# Altium PCB Sensor_Box_PoE.PCBDOC
Units mm, origin at the board's own origin, x right, y up, seen from the top; angles counter-clockwise.
Board outline 21.4 x 72.8 mm, 2 copper layers (Top, Bot), stack 1.571 mm thick; 39 components, 27 nets, 112 pads, 32 vias.
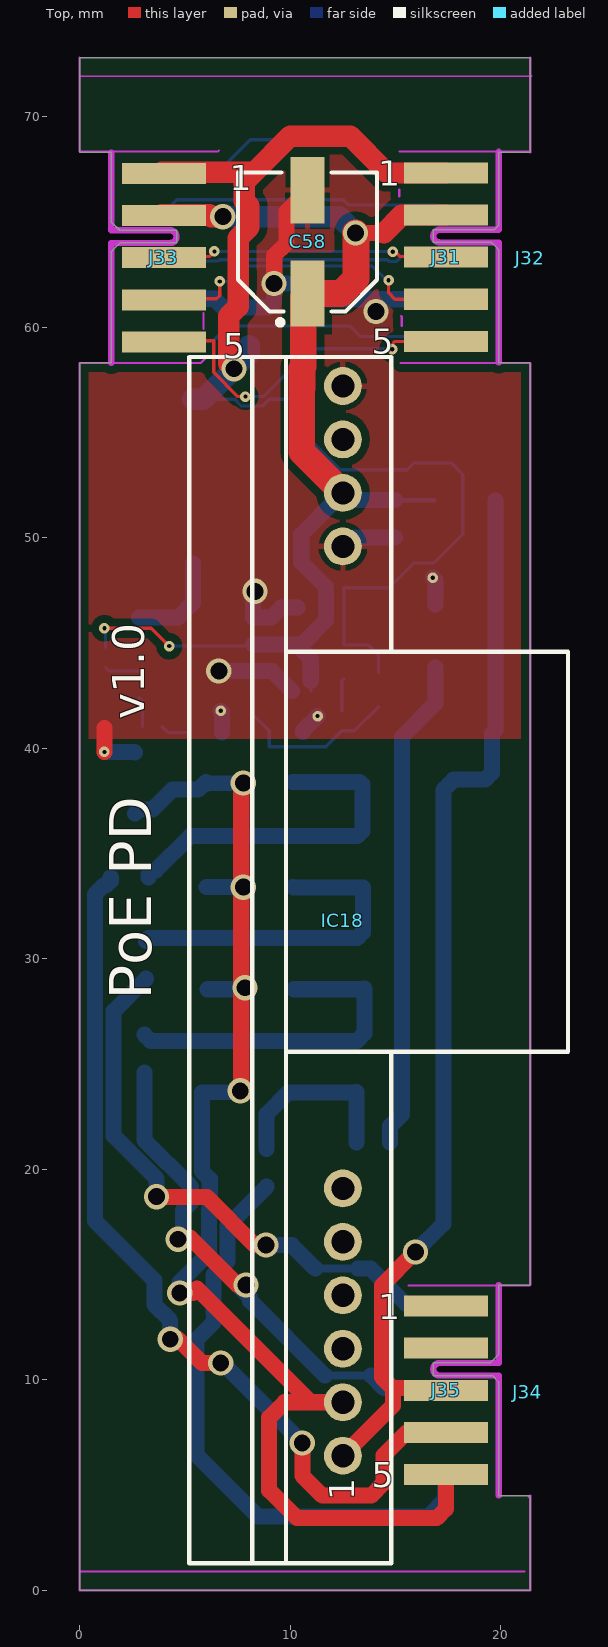
[diagram p0: Top view]
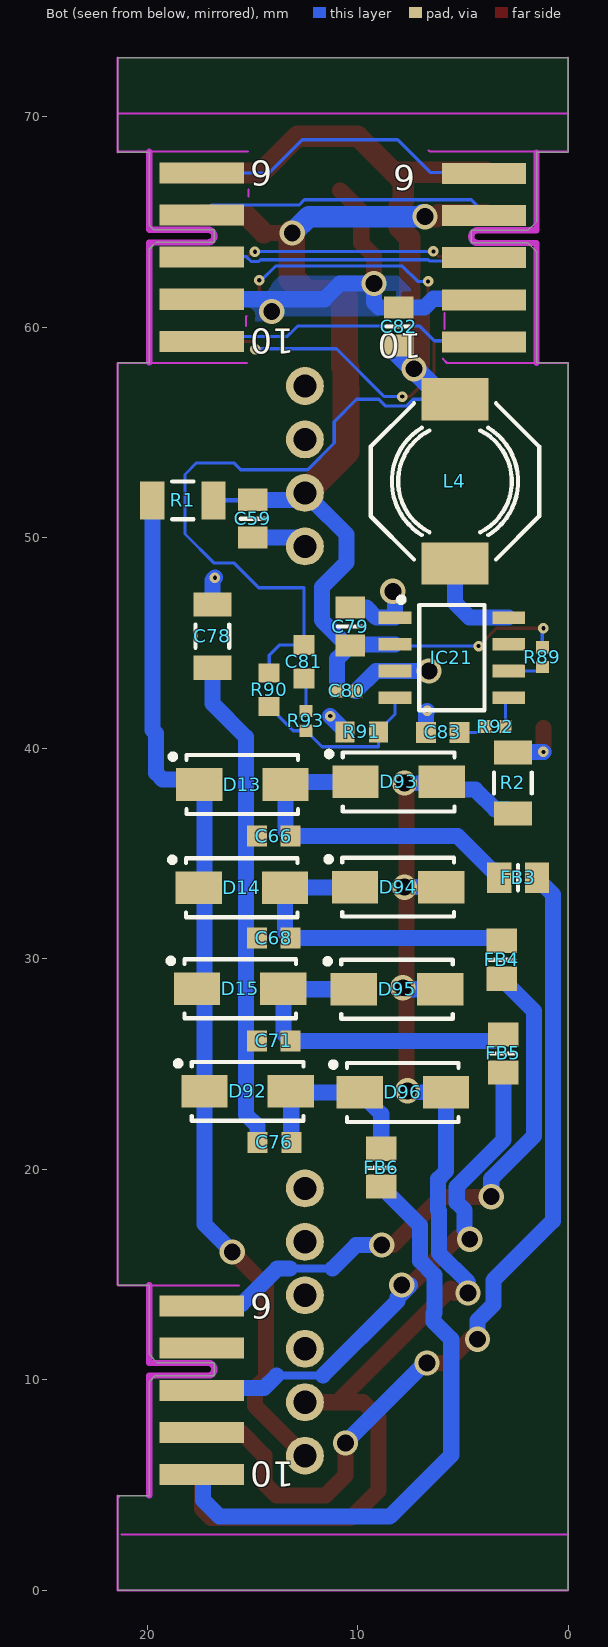
[diagram p1: Bot view, seen from below]
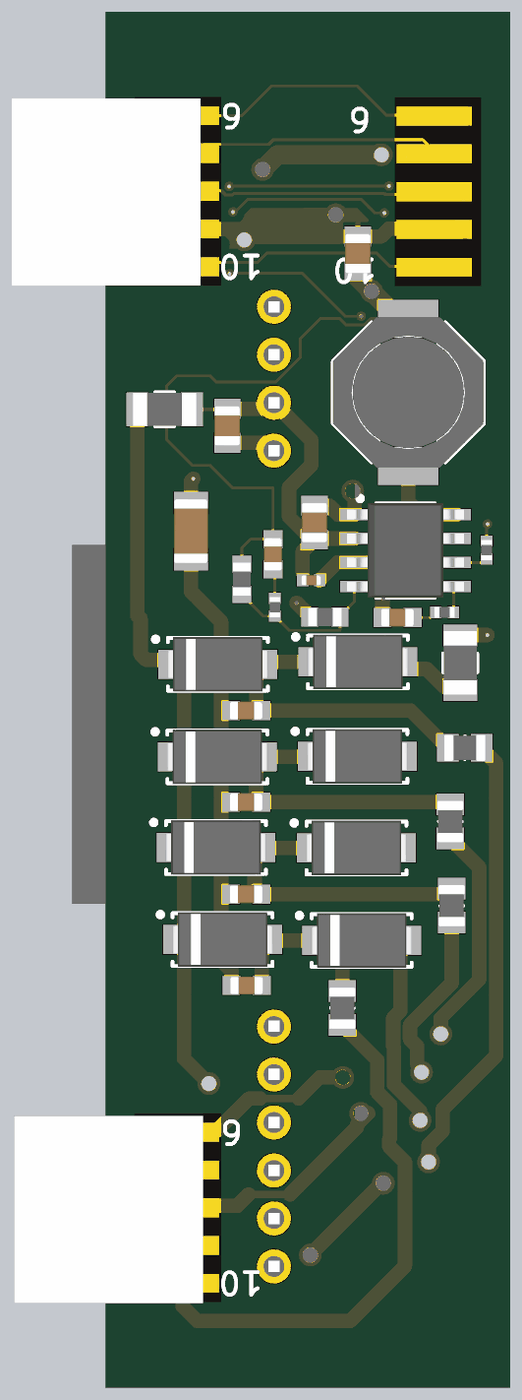
[diagram p2: 3D render of the assembled board from below, using the file's embedded part models]

## Layer stack, top to bottom
TopSolder: solder mask 0.0102, Solder Resist, Dk 3.5
Top: signal copper 0.0356
Dielectric1: core 1.5, FR-4, Dk 4.8
Bot: signal copper 0.0356
BottomSolder: solder mask 0.0102, Solder Resist, Dk 3.5

## Board outline
0,0 0,43.8 0,58.3 1.5,58.3 1.5,63.6 1.9,64 4.6,64 4.6,64.6 1.9,64.6 1.5,65 1.5,68.3 0,68.3 0,72.8 21.4,72.8 21.4,68.3 19.9,68.3 19.9,64.825 19.7,64.625 16.8,64.625 16.8,64.025 19.575,64.025 19.8,63.8 19.9,63.7 19.9,58.3 21.4,58.3 21.4,14.5 19.9,14.5 19.9,11.2 19.5,10.8 16.8,10.8 16.8,10.2 19.6,10.2 19.9,9.9 19.9,4.5 21.4,4.5 21.4,0

## Design rules (kind name [scope] priority, off if disabled: settings)
Clearance Clearance_DIFF [(InDifferentialPairClass('All Differential Pairs'))] p1: gap=0.127 ignorepadtopadclearanceinfootprint=FALSE except(0: Arc-Hole Track-Hole SMDPad-Hole THPad-Hole Via-Hole Fill-Hole Poly-Hole Region-Hole Text-Hole; 0.254: Arc-Poly Track-Poly SMDPad-Poly THPad-Poly Via-Poly Fill-Poly Poly-Poly Poly-Region Poly-Text)
Clearance [All] p2: gap=0.127 ignorepadtopadclearanceinfootprint=FALSE except(0: Arc-Hole Track-Hole SMDPad-Hole THPad-Hole Via-Hole Fill-Hole Poly-Hole Region-Hole Text-Hole; 0.381: Arc-Poly Track-Poly SMDPad-Poly THPad-Poly Via-Poly Fill-Poly Poly-Poly)
DiffPairsRouting [All] p1: maxlimit=0.254 minlimit=0.127 mostfreqgap=0.127 toplayer_minwidth=0.127 toplayer_maxwidth=0.381 toplayer_prefwidth=0.254 bottomlayer_minwidth=0.127 bottomlayer_maxwidth=0.381 bottomlayer_prefwidth=0.254 maxuncoupledlength=12.7
FabricationTestPointUsage TestPointUsage [All] p1: valid=0 allowmultiple=FALSE
FabricationTestpoint Testpoint [All] p1: side=3 testpointundercomponent=TRUE minsize=1.016 maxsize=2.54 preferedsize=1.524 minholesize=0.508 maxholesize=1.016 preferedholesize=0.813 testpointgrid=0.025 allowsidetop=TRUE allowsidebottom=TRUE usegrid=TRUE gridtolerance=0
HoleSize [All] p1: absolutevalues=TRUE maxlimit=3.81 minlimit=0.025 maxpercent=80.000 minpercent=20.000
HoleToHoleClearance [All] p1: gap=0.025 allowstackedmicrovias=TRUE
MinimumSolderMaskSliver [All] p1: minsoldermaskwidth=0
PlaneClearance [All] p1: clearance=0.254
PlaneConnect [All] p1: planeconnectstyle=Direct reliefexpansion=0.508 reliefentries=4 reliefconductorwidth=0.254 reliefairgap=0.254
PolygonConnect PolygonConnect_pad [(InPadClass('All Pads'))] p1: connectstyle=Relief reliefconductorwidth=0.254 reliefentries=4 polygonreliefangle="90 Angle" airgapwidth=0.254
PolygonConnect [All] p2: connectstyle=Direct reliefconductorwidth=0.254 reliefentries=4 polygonreliefangle="45 Angle" airgapwidth=0.254
RoomDefinition Sensor_Box_PoE [InComponentClass('Sensor_Box_PoE')] p1 off: confinementstyle=ConfineIn formatcopy=TRUE lockcomponents=FALSE outline 69.55,15.15 252.299,15.15 252.299,38.9 69.55,38.9
RoutingVias [All] p1: holewidth=0.2 width=0.5 viastyle="Through Hole" minholewidth=0.2 minwidth=0.5 maxholewidth=1 maxwidth=2
SilkToSilkClearance [All] p1: silktosilkclearance=0
SilkToSolderMaskClearance SilkscreenOverComponentPads [IsPad] p1: minsilkscreentomaskgap=0 clearancetoexposedcopper=TRUE
SolderMaskExpansion [All] p1: expansion=0.051
Width [All] p1: maxlimit=1.27 minlimit=0.127 preferedwidth=0.127
20 further rules are at their usual default settings.

## Components (designator, comment, footprint, x,y, rotation, side; value= is the part's Value field where it differs from the comment)
C58 "100uF" CAPAE660X540N 10.825,64.05 r90 top
C59 "10uF" CAPC2012X135N 14.975,50.9 r90 bottom
C66 "1nF" CAPC1608X87N 13.975,35.825 r0 bottom
C68 "1nF" CAPC1608X87N 13.975,30.975 r180 bottom
C71 "1nF" CAPC1608X87N 13.975,26.1 r0 bottom
C76 "1nF" CAPC1608X87N 13.95,21.275 r180 bottom
C78 "1nF" CAPC3216X180N 16.9,45.325 r90 bottom
C79 "10uF" CAPC2012X135N 10.35,45.775 r270 bottom
C80 "100nF" CAPC1005X55N 10.525,42.725 r0 bottom
C81 "150pF" CAPC1608X87N 12.55,44.1 r90 bottom
C82 "10uF" CAPC2012X135N 8.05,60.025 r90 bottom
C83 "3.9nF" CAPC1608X87N 5.95,40.75 r180 bottom
D13 "SS16" DIOM5127X229N 15.475,38.275 r180 bottom
D14 "SS16" DIOM5127X229N 15.5,33.375 r180 bottom
D15 "SS16" DIOM5127X229N 15.575,28.575 r180 bottom
D92 "SS16" DIOM5127X229N 15.225,23.7 r180 bottom
D93 "SS16" DIOM5127X229N 8.05,38.4 r180 bottom
D94 "SS16" DIOM5127X229N 8.075,33.4 r180 bottom
D95 "SS16" DIOM5127X229N 8.125,28.55 r180 bottom
D96 "SS16" DIOM5127X229N 7.85,23.65 r180 bottom
FB3 "220R@100MHz" INDC2012X105N 2.375,33.85 r0 bottom
FB4 "220R@100MHz" INDC2012X105N 3.15,29.95 r270 bottom
FB5 "220R@100MHz" INDC2012X105N 3.075,25.5 r90 bottom
FB6 "220R@100MHz" INDC2012X105N 8.875,20.075 r270 bottom
IC18 "AG5300" SILVERTEL_AG5300 12.5,31.8 r90 top locked
IC21 "NCP3170ADR2G" SOIC127P600X175-8N 5.525,44.3 r180 bottom
J31 "=Family" EDGE10T5B10_P200W1000L0F100X400 17.4,59.325 r90 top locked
J32 "=Family" "AVX_00 9159 010 061 916" 21.4,63.275 r0 top
J33 "=Family" EDGE10T1B6_P200W1000L0F100X400 4,67.3 r270 top
J34 "=Family" "AVX_00 9159 010 061 916" 21.275,9.4 r180 top
J35 "=Family" EDGE10T5B10_P200W1000L0F100X400 17.4,5.5 r90 top
L4 "6.8uH" IND_BOURNS_SRU8043 5.375,52.675 r90 bottom
R1 "Undefined" RESC3216X65N 18.3,51.775 r180 bottom
R2 "Undefined" RESC3216X65N 2.625,38.35 r90 bottom
R89 "10k" RESC1005X40N 1.225,44.325 r270 bottom
R90 "43k" RESC1608X55N 14.2,42.775 r90 bottom
R91 "8k2" RESC1608X55N 9.8,40.775 r0 bottom
R92 "10k" RESC1005X40N 3.45,41.025 r180 bottom
R93 "1k" RESC1005X40N 12.45,41.3 r90 bottom

## Footprints (in the part's own frame and the unit in brackets; to place one, negate y for a bottom-side part, rotate by r counter-clockwise, add the part's x,y. Pads: shape width x height; smd on the part's side, far side on the other; paste and mask are expansions set on the pad)
"AVX_00 9159 010 061 916" [mm] "10 Contacts, 2mm Pitch, Open Ended Card Edge Connector, 9159 Series"
  body extent -5,-4.95 5,4.95, height 1.7
CAPAE660X540N [mm] "Capacitor, Aluminium Electrolytric, 6.6mm L X 6.6mm W X 5.4mm H, IPC Medium Density"
  rect 3.15x1.6 smd: 1(-2.45,0) 2(2.45,0)
  silkscreen extent -3.95,-3.3 3.3,3.3, body extent -3.9,-3.4 3.9,3.4, height 5.7
CAPC1005X55N [mm] "Chip Capacitor, Body 1.0x0.55mm, IPC Medium Density"
  rect 0.62x0.62 smd: 1(-0.45,0) 2(0.45,0)
  body extent -0.52,-0.27 0.53,0.28, height 0.55
CAPC1608X87N [mm] "Chip Capacitor, Body 1.6x0.8mm IPC Medium Density"
  rect 0.95x1 smd: 1(-0.8,0) 2(0.8,0)
  body extent -0.87,-0.47 0.88,0.48, height 0.87
CAPC2012X135N [mm] "Chip Capacitor, Body 2.0x1.25mm, IPC Medium Density"
  rect 1.05x1.4 smd: 1(-0.9,0) 2(0.9,0)
  silkscreen extent 0,-0.58 0,0.58, body extent -1.05,-0.67 1.05,0.68, height 1.25
CAPC3216X180N [mm] "Chip Capacitor, Body 3.2x1.6mm, IPC Medium Density"
  rect 1.15x1.8 smd: 1(-1.5,0) 2(1.5,0)
  silkscreen extent -0.55,-0.8 0.55,0.8, body extent -1.7,-0.9 1.7,0.9, height 1.8
DIOM5127X229N [mm] "DO-214-AC/SMA Molded Diode, 2-Leads, Body 5.1x2.7mm, IPC Medium Density"
  rect 2.2x1.55 smd: 1(-2.05,0) 2(2.05,0)
  silkscreen extent -3.43,-1.4 2.65,1.45, body extent -2.67,-1.45 2.68,1.45, height 2.29
EDGE10T1B6_P200W1000L0F100X400 [mm] "10 contacts Board Edge Connector, First Left Top Pad 1, First Left Bottom Pad 2, Pitch 2mm, Length 0mm, Width 10mm, Finger Lenght 4mm, Finger Width 1mm"
  rect 1x4 smd paste-0.5: 1(0,0) 2(2,0) 3(4,0) 4(6,0) 5(8,0)
  rect 1x4 smd far side paste-0.5: 6(0,0) 7(2,0) 8(4,0) 9(6,0) 10(8,0)
  KeepOutLayer lines w0.3: 9,-2.5 3.3,-2.5 3.3,0.3 ccw(c3,0.3) 2.7,0.3 2.7,-2.5 -1,-2.5
EDGE10T5B10_P200W1000L0F100X400 [mm] "10 contacts Board Edge Connector, First Left Top Pad 5, First Left Bottom Pad 10, Pitch 2mm, Length 0mm, Width 10mm, Finger Lenght 4mm, Finger Width 1mm"
  rect 1x4 smd paste-0.5: 1(8,0) 2(6,0) 3(4,0) 4(2,0) 5(0,0)
  rect 1x4 smd far side paste-0.5: 6(8,0) 7(6,0) 8(4,0) 9(2,0) 10(0,0)
  KeepOutLayer lines w0.3: -1,-2.5 4.7,-2.5 4.7,0.3 cw(c5,0.3) 5.3,0.3 5.3,-2.5 9,-2.5
IND_BOURNS_SRU8043 [mm] "SMD Inductor Body Width 8.3mm Body Lenght 8.3mm Height 4.6mm"
  rect 2x3.2 smd: 1(-3.9,0) 2(3.9,0)
  silkscreen extent -3.71,-4 3.71,4, body extent -4,-4 4,4, height 4.3
INDC2012X105N [mm] "Chip Inductor, EIA 0805, Metric 2012, Body 2.0x1.25mm, IPC Medium Density"
  rect 1.15x1.45 smd: 1(-0.9,0) 2(0.9,0)
  silkscreen extent 0,-0.6 0,0.6, body extent -1.1,-0.7 1.1,0.7, height 1.1
RESC1005X40N [mm] "Chip Resistor, EIA 0402, Metric 1005, Body 1.0x0.5mm, IPC Medium Density"
  rect 0.58x0.62 smd: 1(-0.47,0) 2(0.47,0)
  body extent -0.52,-0.27 0.53,0.28, height 0.4
RESC1608X55N [mm] "Chip Resistor, EIA 0603, Metric 1608, Body 1.6x0.8mm, IPC Medium Density"
  rect 0.9x1 smd: 1(-0.8,0) 2(0.8,0)
  body extent -0.87,-0.47 0.88,0.48, height 0.55
RESC3216X65N [mm] "Chip Resistor, EIA 1206, Metric 3216, Body 3.2x1.6mm, IPC Medium Density"
  rect 1.15x1.8 smd: 1(-1.45,0) 2(1.45,0)
  silkscreen extent -0.5,-0.9 0.5,0.9, body extent -1.67,-0.87 1.68,0.88, height 0.65
SILVERTEL_AG5300 [mm] "Power-over-Ethernet Plus (POE+) Module, Body L 57.3mm x W 18mm x H 14mm"
  round 1.8 hole 1.1: 1(-25.406,0) 2(-22.866,0) 3(-20.326,0) 4(-17.786,0) 5(-15.246,0) 6(-12.706,0) 7(17.786,0) 8(20.326,0) 9(22.866,0) 10(25.406,0)
  silkscreen extent -30.52,-10.7 26.78,7.3, body extent -30.52,-10.7 26.78,7.3, height 14
SOIC127P600X175-8N [mm] "SOIC 8, Pitch 1.27mm - Body 4x5mm, IPC Medium Density"
  rect 1.55x0.6 smd: 1(-2.7,1.905) 2(-2.7,0.635) 3(-2.7,-0.635) 4(-2.7,-1.905) 5(2.7,-1.905) 6(2.7,-0.635) 7(2.7,0.635) 8(2.7,1.905)
  silkscreen extent -2.53,-2.5 1.55,2.88, body extent -3.1,-2.5 3.1,2.5, height 1.75

## Part data
C58: library part CAE660-540_100UF_16V_20%, "Polarised capacitor", Case=D, Manufacturer=PANASONIC, Manufacturer Part Number=EEEFK1C101AP, Tolerance=±20%, Voltage=16V, Author="CERN DEM JLC", ComponentHeight=5.8mm, Component Type=Standard, CreateDate=03.12.2007, HelpURL=\\cern.ch\dfs\Applications\Altium\Datasheets\CAE_PANASONIC_FK.pdf, LatestRevisionDate=05.11.2014, Mounted=Yes, Part Description="Aluminum Electrolytic SMT Capacitor", Part Number=CAE660-540_100UF_16V_20%, Pin Count=2, Sense=No, SMD=Yes, Socket=No, Status="Not Recommended"
C59 C79 C82: library part CC0805_10UF_16V_10%_X5R, "Non-polarised capacitor", Case=0805, Manufacturer=GENERIC, Manufacturer1 ComponentHeight=1.4mm, Manufacturer1 Example=KEMET, Manufacturer1 Part Number=C0805C106K4PAC, Tolerance=±10%, Voltage=16V, Author="CERN DEM JLC", Component Type=Standard, CreateDate=03.12.2007, HelpURL=\\cern.ch\dfs\Applications\Altium\Datasheets\CC1206_X5R_KEMET.pdf, LatestRevisionDate=03.12.2007, Manufacturer Part Number=CC0805_10UF_16V_10%_X5R, Mounted=Yes, Part Description="SMD Multilayer Chip Ceramic Capacitor", Part Number=CC0805_10UF_16V_10%_X5R, Pin Count=2, Sense=No, SMD=Yes, Socket=No, Status=Preferred, TC=X5R
C66 C68 C71 C76: library part CC0603_1NF_100V_10%_X7R, "Non-polarised capacitor", Case=0603, Manufacturer=GENERIC, Manufacturer1 ComponentHeight=0.87mm, Manufacturer1 Example=KEMET, Manufacturer1 Part Number=C0603C102K1RACTU, Tolerance=±10%, Voltage=100V, Author="CERN DEM JLC", Component Type=Standard, CreateDate=12.12.2013, HelpURL=\\cern.ch\dfs\Applications\Altium\Datasheets\CC0603_X7R_KEMET.pdf, LatestRevisionDate=12.12.2013, Manufacturer Part Number=CC0603_1NF_100V_10%_X7R, Mounted=Yes, Part Description="SMD Multilayer Chip Ceramic Capacitor", Part Number=CC0603_1NF_100V_10%_X7R, Pin Count=2, Sense=No, SMD=Yes, Socket=No, Status=Preferred, TC=X7R
C78: library part CC1206_1NF_2KV_10%_X7R, "Non-polarised capacitor", Case=1206, Manufacturer=GENERIC, Manufacturer1 ComponentHeight=1.8mm, Manufacturer1 Example=AVX, Manufacturer1 Part Number=1206GC102KAT2A, Tolerance=±10%, Voltage=2kV, Author="CERN DEM JLC", Component Type=Standard, CreateDate=19.11.2012, HelpURL=\\cern.ch\dfs\Applications\Altium\Datasheets\CC1206_X7R_AVX_HV-MLC.pdf, LatestRevisionDate=17.05.2017, Manufacturer Part Number=CC1206_1NF_2KV_10%_X7R, Mounted=Yes, Part Description="High Voltage MLC Chip Capacitor", Part Number=CC1206_1NF_2KV_10%_X7R, Pin Count=2, Sense=No, SMD=Yes, Socket=No, Status=None, TC=X7R
C80: library part CC0402_100NF_16V_10%_X5R, "Non-polarised capacitor", Case=0402, Manufacturer=GENERIC, Manufacturer1 ComponentHeight=0.55mm, Manufacturer1 Example=MURATA, Manufacturer1 Part Number=GRM155R61C104KA88D, Tolerance=±10%, Voltage=16V, Author="CERN DEM JLC", Component Type=Standard, CreateDate=10.12.2013, HelpURL=\\cern.ch\dfs\Applications\Altium\Datasheets\CC0402_X5R_MURATA_GRM.pdf, LatestRevisionDate=10.12.2013, Manufacturer Part Number=CC0402_100NF_16V_10%_X5R, Mounted=Yes, Part Description="SMD Multilayer Chip Ceramic Capacitor", Part Number=CC0402_100NF_16V_10%_X5R, Pin Count=2, Sense=No, SMD=Yes, Socket=No, Status=None, TC=X5R
C81: library part CC0603_150PF_50V_1%_NP0, "Non-polarised capacitor", Case=0603, Manufacturer=GENERIC, Manufacturer1 ComponentHeight=0.7mm, Manufacturer1 Example=PHYCOMP, Manufacturer1 Part Number=CC0603FRNPO9BN151, Tolerance=±1%, Voltage=50V, Author="CERN DEM MR", Component Type=Standard, CreateDate=17.02.2016, HelpURL=\\cern.ch\dfs\Applications\Altium\Datasheets\CC0805_NP0_PHYCOMP_16VTO50V.pdf, LatestRevisionDate=17.02.2016, Manufacturer Part Number=CC0603_150PF_50V_1%_NP0, Mounted=Yes, Part Description="SMD Multilayer Chip Ceramic Capacitor", Part Number=CC0603_150PF_50V_1%_NP0, Pin Count=2, Sense=No, SMD=Yes, Socket=No, Status=None, TC=C0G/NP0
C83: library part CC0603_3.9NF_50V_5%_X7R, "Non-polarised capacitor", Case=0603, Manufacturer=GENERIC, Manufacturer1 ComponentHeight=0.87mm, Manufacturer1 Example=PHYCOMP, Manufacturer1 Part Number=223858615631, Tolerance=±5%, Voltage=50V, Author="CERN DEM JLC", Component Type=Standard, CreateDate=03.12.2007, HelpURL=\\cern.ch\dfs\Applications\Altium\Datasheets\CC0603_X7R_PHYCOMP.pdf, LatestRevisionDate=03.12.2007, Manufacturer Part Number=CC0603_3.9NF_50V_5%_X7R, Mounted=Yes, Part Description="SMD Multilayer Chip Ceramic Capacitor", Part Number=CC0603_3.9NF_50V_5%_X7R, Pin Count=2, Sense=No, SMD=Yes, Socket=No, Status=Preferred, TC=X7R
D13 D14 D15 D92 D93 D94 D95 D96: "Schottky Diode", Case=DO-214AC, Manufacturer="VISHAY GENERAL SEMICONDUCTOR", Power=1A, Voltage=60V, Author="CERN DEM JLC", Bonding=No, ComponentHeight=2.29mm, Component Type=Standard, CreateDate=15.07.2008, Device=SS16, HelpURL=\\cern.ch\dfs\Applications\Altium\Datasheets\SS16.pdf, LatestRevisionDate=23.08.2010, Manufacturer Part Number=SS16, Mounted=Yes, PackageDescription="DO-214-AC Molded Diode, Body 5.1x2.7mm, IPC Medium Density", Part Description="Surface Mount Schottky Barrier Rectifier", Part Number=SS16, Pin Count=2, PressFit=No, Sense=No, SMD=Yes, Socket=No
FB3 FB4 FB5 FB6: library part IND0805_MURATA_BLM21PG221SN1D, "Inductor", Case=0805, Manufacturer=MURATA, Manufacturer Part Number=BLM21PG221SN1D, Power=2A, Resistance=0.05R, Tolerance=±25%, Author="CERN DEM JLC", ComponentHeight=1.05mm, Component Type=Standard, CreateDate=2010-01-25, HelpURL=\\cern.ch\dfs\Applications\Altium\Datasheets\IND0402_MURATA_BLM21P.pdf, LatestRevisionDate=2010-01-25, Mounted=Yes, Part Description="SMD EMIFIL Suppression Chip Ferrite Bead", Part Number=IND0805_MURATA_BLM21PG221SN1D, Pin Count=2, SMD=Yes, Socket=No, Status=None, Table="Inductors SMD"
IC18: "Power-over-Ethernet Plus (POE+) Module", Manufacturer=SILVERTEL, Author="CERN DEM JLC", Bonding=No, ComponentHeight=14mm, Component Type=Standard, CreateDate=20.03.2018, Device=AG5300, HelpURL=\\cern.ch\dfs\Applications\Altium\Datasheets\AG5300.pdf, LatestRevisionDate=20.03.2018, Manufacturer Part Number=AG5300, Mounted=Yes, PackageDescription="Power-over-Ethernet Plus (POE+) Module, Body L 57.3mm x W 18mm x H 14mm", Part Description="12V 30W Power-over-Ethernet Plus (POE+)", Part Number=AG5300, Pin Count=10, PressFit=No, Sense=No, SMD=No, Socket=No
IC21: "Synchronous PWM Switching Converter", Case=SOIC8, Manufacturer="ON SEMICONDUCTOR", Author="CERN DEM MR", Bonding=No, ComponentHeight=1.75mm, Component Type=Standard, CreateDate=30.05.2016, Device=NCP3170ADR2G, HelpURL=\\cern.ch\dfs\Applications\Altium\Datasheets\NCP3170ADR2G.pdf, LatestRevisionDate=30.05.2016, Manufacturer Part Number=NCP3170ADR2G, Mounted=Yes, PackageDescription="SOIC 8, Pitch 1.27mm - Body 4x5mm, IPC Medium Density", Part Description="Synchronous PWM Switching Converter", Part Number=NCP3170ADR2G, Pin Count=8, PressFit=No, Sense=No, SMD=Yes, Socket=No
J31 J35: library part EDGE10T5B10_P200W1000L0F100X400, "PCB Edge Connector 10 (2x5)", Author="CERN DEM MR", ComponentHeight=0mm, Component Type="Standard (No BOM)", CreateDate=14.02.2018, HelpURL=\\cern.ch\dfs\Applications\Altium\Datasheets\EDGE10T5B10_P200W1000L0F100X400.pdf, LatestRevisionDate=14.02.2018, Mounted=No, Part Description="10 Contacts Board Edge Connector, Pitch 2mm, Length 0mm, Width 10mm, Finger Lenght 4mm, Finger Width 1mm", Part Number=EDGE10T5B10_P200W1000L0F100X400, Pin Count=10, PressFit=No, Sense=No, SMD=No, Socket=No, Status=None
J32 J34: library part "AVX_00 9159 010 061 916", "Open Ended Card Edge Connector, 9159 Series", Manufacturer=AVX, Manufacturer Part Number="00 9159 010 061 916", Author="CERN DEM MR", ComponentHeight=1.6mm, Component Type=Standard, CreateDate=13.02.2018, HelpURL="\\cern.ch\dfs\Applications\Altium\Datasheets\AVX_00 9159 010 061 916.pdf", LatestRevisionDate=13.02.2018, Mounted=Yes, Part Description="10 Contacts, 2mm Pitch, Open Ended Card Edge Connector, 9159 Series", Part Number="AVX_00 9159 010 061 916", Pin Count=10, PressFit=No, Sense=No, SMD=No, Socket=No, Status=None
J33: library part EDGE10T1B6_P200W1000L0F100X400, "PCB Edge Connector 10 (2x5)", Author="CERN DEM MR", ComponentHeight=0mm, Component Type="Standard (No BOM)", CreateDate=14.02.2018, HelpURL=\\cern.ch\dfs\Applications\Altium\Datasheets\EDGE10T1B6_P200W1000L0F100X400.pdf, LatestRevisionDate=14.02.2018, Mounted=No, Part Description="10 Contacts Board Edge Connector, Pitch 2mm, Length 0mm, Width 10mm, Finger Lenght 4mm, Finger Width 1mm", Part Number=EDGE10T1B6_P200W1000L0F100X400, Pin Count=10, PressFit=No, Sense=No, SMD=No, Socket=No, Status=None
L4: library part IND_6.8UH_30%_BOURNS_SRU8043, "Inductor", Manufacturer=BOURNS, Manufacturer Part Number=SRU8043-6R8Y, Power=3.8A, Resistance=0.0224R, Tolerance=±30%, Author="CERN DEM JMW", ComponentHeight=4.6mm, Component Type=Standard, CreateDate=06.08.2015, HelpURL=\\cern.ch\dfs\Applications\Altium\Datasheets\IND_BOURNS_SRU8043.pdf, LatestRevisionDate=06.08.2015, Mounted=Yes, Part Description="Shielded SMD Power Inductor", Part Number=IND_6.8UH_30%_BOURNS_SRU8043, Pin Count=2, Sense=No, SMD=Yes, Socket=No, Status=None
R1 R2: library part R1206_NO-VALUE, "Resistor", Case=1206, Manufacturer1 ComponentHeight=0.65mm, Author="CERN DEM JLC", Component Type=Standard, CreateDate=03.12.2007, HelpURL=Undefined, LatestRevisionDate=13.03.2008, Manufacturer=Undefined, Manufacturer1 Example=Undefined, Manufacturer1 Part Number=Undefined, Manufacturer Part Number=R1206_NO-VALUE, Mounted=No, Part Description="Reserved Footprint For a 1206 (3216) Chip Resistor", Part Number=R1206_NO-VALUE, Pin Count=2, PressFit=No, Sense=No, SMD=Yes, Socket=No, Status=None
R89 R92: library part R0402_10K_1%_0.0625W_100PPM, "Resistor - 1%", Case=0402, Manufacturer=GENERIC, Manufacturer1 ComponentHeight=0.4mm, Manufacturer1 Example="YAGEO PHYCOMP", Manufacturer1 Part Number=232270671003L, Power=0.0625W, Tolerance=±1%, Author="CERN DEM JLC", Component Type=Standard, CreateDate=03.12.2007, HelpURL=\\cern.ch\dfs\Applications\Altium\Datasheets\R0402_Phycomp_RC0402.pdf, LatestRevisionDate=17.10.2012, Manufacturer Part Number=R0402_10K_1%_0.0625W_100PPM, Mounted=Yes, Part Description="General Purpose Thick Film Chip Resistor", Part Number=R0402_10K_1%_0.0625W_100PPM, Pin Count=2, PressFit=No, Sense=No, SMD=Yes, Socket=No, Status="Not Recommended", TC=±100ppm/°C
R90: library part R0603_43K_1%_0.1W_100PPM, "Resistor - 1%", Case=0603, Manufacturer=GENERIC, Manufacturer1 ComponentHeight=0.55mm, Manufacturer1 Example="NIC COMPONENT", Manufacturer1 Part Number=NRC06F4302TRF, Power=0.1W, Tolerance=±1%, Author="CERN DEM JLC", Component Type=Standard, CreateDate=03.12.2007, HelpURL=\\cern.ch\dfs\Applications\Altium\Datasheets\R0603_NIC_NRC.pdf, LatestRevisionDate=13.03.2008, Manufacturer Part Number=R0603_43K_1%_0.1W_100PPM, Mounted=Yes, Part Description="General Purpose Thick Film Chip Resistor", Part Number=R0603_43K_1%_0.1W_100PPM, Pin Count=2, PressFit=No, Sense=No, SMD=Yes, Socket=No, Status=Preferred, TC=±100ppm/°C
R91: library part R0603_8K2_1%_0.1W_100PPM, "Resistor - 1%", Case=0603, Manufacturer=GENERIC, Manufacturer1 ComponentHeight=0.55mm, Manufacturer1 Example="NIC COMPONENT", Manufacturer1 Part Number=NRC06F8201TRF, Power=0.1W, Tolerance=±1%, Author="CERN DEM JLC", Component Type=Standard, CreateDate=03.12.2007, HelpURL=\\cern.ch\dfs\Applications\Altium\Datasheets\R0603_NIC_NRC.pdf, LatestRevisionDate=13.03.2008, Manufacturer Part Number=R0603_8K2_1%_0.1W_100PPM, Mounted=Yes, Part Description="General Purpose Thick Film Chip Resistor", Part Number=R0603_8K2_1%_0.1W_100PPM, Pin Count=2, PressFit=No, Sense=No, SMD=Yes, Socket=No, Status=Preferred, TC=±100ppm/°C
R93: library part R0402_1K_1%_0.0625W_100PPM, "Resistor - 1%", Case=0402, Manufacturer=GENERIC, Manufacturer1 ComponentHeight=0.4mm, Manufacturer1 Example="YAGEO PHYCOMP", Manufacturer1 Part Number=232270671002L, Power=0.0625W, Tolerance=±1%, Author="CERN DEM JLC", Component Type=Standard, CreateDate=03.12.2007, HelpURL=\\cern.ch\dfs\Applications\Altium\Datasheets\R0402_Phycomp_RC0402.pdf, LatestRevisionDate=17.10.2012, Manufacturer Part Number=R0402_1K_1%_0.0625W_100PPM, Mounted=Yes, Part Description="General Purpose Thick Film Chip Resistor", Part Number=R0402_1K_1%_0.0625W_100PPM, Pin Count=2, PressFit=No, Sense=No, SMD=Yes, Socket=No, Status="Not Recommended", TC=±100ppm/°C

## Via types
v1: diameter 1.2, hole 0.8, Top to Bot, tented both sides, 20 vias
v2: diameter 0.5, hole 0.2, Top to Bot, tented both sides, 12 vias

## Nets (pads, with @x,y where several pads share a name; then routed paths per layer and width w, separated by ;. In a path a pad name is that pad's centre, name@x,y a point inside that pad or via, vN(x,y) a via of type N, cw(c..) or ccw(c..) an arc to the next point about the centre after c; other vN are vias at no path point)
12V_POE: C58.1 C59.2 C79.2 C80.2 IC18.8 IC21.2 J31.2 J33.2 R1.2 R89.1 | length 56.5
  Top w0.152: v2(1.175,45.7) 3.4,45.7 v2(4.25,44.85)
  Top w0.762: v1(13.1,64.475) 14.45,64.475
  Top w1.016: J33.2@3.9,65.35 6.15,65.35 6.25,65.25 v1(6.8,65.25) ; 14.45,64.475 15.3,65.325 J31.2
  Top w1.27: IC18.8 10.55,54.076 10.55,57.094 10.562,57.106 10.562,57.944 10.55,57.956 10.55,58.054 10.625,58.129 10.625,61.4 C58.1 12.425,61.6 13.125,62.3 13.125,64.45 v1(13.1,64.475)
  Bot w0.152: v2(1.175,45.7) 1.225,45.65 R89.1 ; v2(4.25,44.85) 8.14,44.85 IC21.2 ; C79.2@10.493,44.875 10.975,44.393 10.975,44.25 ; C80.2 10.975,43.185
  Bot w0.2: C59.2 15,51.775 R1.2
  Bot w0.762: IC21.2 10.29,44.935 C79.2 10.975,44.25 10.975,43.185 ; C79.2@10.493,44.875 11.7,46.082 11.7,47.65 10.525,48.825 10.525,50.151 12.174,51.8 C59.2
  Bot w1.016: v1(6.8,65.25) v1@6.916,65.25 ; v1@6.916,65.331 v1@6.916,65.25 ; v1(13.1,64.475) 12.325,65.25 v1@6.916,65.25
EARTH: C66.2 C68.1 C71.2 C76.1 C78.1 | length 23.4
  Bot w0.762: C76.1 14.75,22.05 15.3,22.6 15.3,35.825 15.3,40.525 16.9,42.125 C78.1
GND: C58.2 C59.1 C78.2 C79.1 C80.1 C82.2 C83.1 IC18.7 IC18.10 IC21.1 IC21.3 J31.9 J33.9 R2.2 R91.2 | length 36.2
  Top w0.762: v2(1.175,39.825) 1.175,40.95 ; v1(9.225,62.075) 9.225,63.392 9.825,63.992 9.825,65.5 C58.2
  Bot w0.762: v2(1.175,39.825) 2.6,39.825 R2.2 ; J33.9@3.9,61.35 6.4,61.35 6.825,60.925 C82.2 8.975,60.925 9.225,61.175 v1(9.225,62.075) 10.825,62.075 11.575,61.325 J31.9 ; v1@6.6,43.675 v1(6.61,43.665) IC21.3 9.135,43.665 C80.1 ; v2(6.7,41.775) 6.75,41.725 C83.1 ; v1(8.325,47.45) 8.225,47.35 IC21.1 9.105,46.205 9.575,46.675 C79.1 ; R91.2 10.6,40.825 v2(11.3,41.525) ; IC18.7 12.914,50 C59.1 ; v2(16.775,48.1) 16.9,47.975 C78.2
  other v1: 14.075,60.744
NetC81_1: C81.1 R93.2 | length 1.6
  Bot w0.152: R93.2 12.45,43.2 C81.1
NetC83_2: C83.2 R92.1 | length 1.3
  Bot w0.152: R92.1 4.195,40.75 C83.2
NetIC21_4: IC21.4 R90.1 R91.1 R93.1 | length 8.6
  Bot w0.152: IC21.4 8.225,41.6 9,40.825 R91.1 9,40.072 11.692,40.072 R93.1 13.055,40.83 R90.1
NetIC21_5: IC21.5 R92.2 | length 1.4
  Bot w0.152: IC21.5 2.98,42.24 R92.2
NetIC21_6: IC21.6 R89.2 | length 1.7
  Bot w0.152: R89.2 1.415,43.665 IC21.6
NetIC21_8: IC21.8 L4.1 | length 4.7
  Bot w0.762: IC21.8 4.68,46.205 5.375,46.9 L4.1
NetJ31_3: J31.3 J33.3 | length 13.9
  Top w0.152: J33.3@3.9,63.35 6.15,63.35 v2(6.4,63.6) ; v2(14.875,63.578) 15.001,63.578 15.229,63.35 17.375,63.35 J31.3
  Bot w0.152: v2(6.4,63.6) 14.779,63.6 14.875,63.696 v2(14.875,63.578)
NetJ31_4: J31.4 J33.4 | length 15.6
  Top w0.152: J33.4@3.9,61.35 6.5,61.35 6.65,61.5 v2(6.65,62.175) ; v2(14.675,62.225) 14.675,61.625 14.975,61.325 J31.4
  Bot w0.152: v2(6.65,62.175) 7.15,62.175 7.875,62.9 13.9,62.9 14.625,62.175 v2(14.675,62.225)
NetJ31_5: J31.5 J33.5 | length 16.7
  Top w0.152: J33.5@3.9,59.35 6.364,59.35 6.364,57.85 7.514,56.7 7.873,56.7 v2(7.875,56.703) ; v2(14.85,58.95) 14.85,59.2 14.975,59.325 J31.5
  Bot w0.152: v2(7.875,56.703) 8.728,56.703 11,58.975 14.825,58.975 v2(14.85,58.95)
NetJ31_6: J31.6 J33.6 | length 14.8
  Bot w0.152: J33.6@3.9,67.35 6.55,67.35 8.1,68.9 12.625,68.9 14.2,67.325 J31.6
NetJ31_7: J31.7 J33.7 | length 14.1
  Bot w0.152: J33.7@3.9,65.35 4.603,66.053 12.528,66.053 12.781,65.8 16.925,65.8 J31.7
NetJ31_8: J31.8 J33.8 | length 13.7
  Bot w0.152: J33.8@3.9,63.35 4.103,63.147 6.588,63.147 6.641,63.2 14.612,63.2 14.687,63.125 15.063,63.125 15.288,63.35 17.375,63.35 J31.8
NetJ31_10: J31.10 J33.10 | length 14.1
  Bot w0.152: J33.10@3.9,59.35 6.35,59.35 7.05,60.05 12.855,60.05 13.355,59.55 17.175,59.55 J31.10
P5V0: C81.2 C82.1 J31.1 J33.1 L4.2 R90.2 | length 58.9
  Top w1.016: J33.1@3.9,67.35 8.275,67.35 ; v1(7.325,58.025) 7.075,58.275 7.075,60.525 7.525,60.975 7.525,61.798 7.535,61.808 7.535,62.65 7.525,62.66 7.525,64.228 8.035,64.738 8.035,65.762 7.825,65.972 7.825,66.9 8.275,67.35 ; J31.1 14.6,67.325 12.85,69.075 10,69.075 8.275,67.35
  Bot w0.152: L4.2@5.875,56.575 7.362,56.575 7.688,56.25 8.67,56.25 8.995,56.575 10.05,56.575 11.109,55.516 11.109,54.497 12.377,53.229 15.558,53.229 15.878,53.55 17.65,53.55 18.199,53.001 18.199,50.174 16.828,48.803 15.878,48.803 14.701,47.626 12.55,47.626 C81.2 13.725,44.9 14.2,44.425 R90.2
  Bot w1.016: L4.2 5.875,56.575 v1(7.325,58.025) 8.05,58.75 C82.1
POE_IN1: C66.1 D13.2 D93.1 FB3.2 | length 16.7
  Bot w0.762: FB3.2 3.275,34 3.469,34.194 3.619,34.194 5.25,35.825 C66.1 13.425,36.075 D13.2 13.3,38.4 D93.1
POE_IN2: C68.2 D14.2 D94.1 FB4.1 | length 15.9
  Bot w0.762: FB4.1 3.275,30.975 C68.2 13.45,31.25 D14.2 10.15,33.375 D94.1
POE_IN3: C71.1 D15.2 D95.1 FB5.2 | length 16.2
  Bot w0.762: FB5.2 3.375,26.1 C71.1 13.525,26.45 D15.2 13.5,28.55 D95.1
POE_IN4: C76.2 D92.2 D96.1 FB6.1 | length 8.8
  Bot w0.762: FB6.1 8.875,22.625 D96.1 13.125,23.65 13.15,23.675 C76.2
POE_VC1: FB3.1 J35.4 | length 42.9
  Top w0.762: v1(4.3,11.925) 4.675,11.925 5.799,10.801 v1(6.7,10.801) ; v1(10.575,7) 10.575,5.45 11.525,4.5 13.85,4.5 14.425,5.075 14.425,6.4 15.525,7.5 J35.4
  Bot w0.762: FB3.1 1.475,33.7 1.281,33.506 1.171,33.506 0.725,33.06 0.725,17.55 3.55,14.725 3.55,13.575 4.3,12.825 v1(4.3,11.925) ; v1(6.7,10.801) 6.774,10.801 v1(10.575,7)
POE_VC1+: D13.1 D14.1 D15.1 D92.1 IC18.1 J35.3 R1.1 | length 52.2
  Top w0.762: IC18.1 14.875,8.769 14.875,9.6 ; v1(15.95,16.075) 14.35,14.475 14.35,10.125 14.875,9.6 ; J35.3@17.35,9.6 14.875,9.6
  Bot w0.762: v1(15.95,16.075) 17.275,17.4 D92.1 17.275,38.025 D13.1 17.759,38.509 19.259,38.509 19.575,38.825 19.575,40.7 19.75,40.875 R1.1
POE_VC1-: D93.2 D94.2 D95.2 D96.2 IC18.2 J35.5 R2.1 | length 62.2
  Top w0.762: v1(4.75,14.125) 5.375,14.125 5.575,14.325 10.966,8.934 ; v1@7.675,23.675 v1@7.675,38.35 ; IC18.2 10.966,8.934 ; J35.5 17.4,3.875 16.95,3.425 10.325,3.425 9,4.75 9,8.2 9.734,8.934 10.966,8.934
  Bot w0.762: R2.1 2.819,37.094 3.469,37.094 4.404,38.029 5.629,38.029 D93.2 6.075,38.325 v1@7.675,38.35 ; v1(4.75,14.125) 4.75,14.625 6.139,16.014 6.139,18.025 6.178,18.064 6.178,19.536 5.8,19.914 D96.2 7.626,23.674 v1@7.675,23.675 ; D94.2 v1@7.575,33.4 ; D95.2 v1@7.625,28.55
  other v1: 7.625,23.725 7.85,28.625 7.775,33.4 7.775,38.35
POE_VC2: FB4.2 J35.6 | length 27.7
  Top w0.762: v1@3.65,18.675 6.05,18.675 8.325,16.4 v1(8.85,16.4)
  Bot w0.381: 11.191,15.284 13.221,15.284
  Bot w0.762: FB4.2 1.614,27.514 1.614,21.586 3.65,19.55 v1(3.65,18.7) v1@3.65,18.675 ; v1(8.85,16.4) 10.075,16.4 11.191,15.284 ; 13.221,15.284 13.816,15.284 15.5,13.6 J35.6@17.35,13.6
POE_VC3: FB5.1 J35.8 | length 25.7
  Top w0.762: v1(4.675,16.675) 5.175,16.675 5.25,16.75 7.5,14.5 v1(7.9,14.5)
  Bot w0.381: 11.646,10.204 13.846,10.204
  Bot w0.762: FB5.1 3.075,21.382 5.289,19.168 5.289,18.432 4.911,18.054 4.911,17.114 4.675,16.878 v1(4.675,16.675) ; v1(7.9,14.5) 7.5,14.5 8.1,13.9 8.1,13.75 11.646,10.204 ; 13.846,10.204 14.45,9.6 J35.8@17.35,9.6
POE_VC4: FB6.2 J35.10 | length 28.8
  Bot w0.762: FB6.2 7.028,17.328 7.028,15.646 6.35,14.968 6.35,13.182 6.389,13.143 6.389,12.764 5.55,11.925 5.55,6.425 8.475,3.5 16.55,3.5 17.35,4.3 J35.10@17.35,5.6
pads on no net: IC18.3 IC18.4 IC18.5 IC18.6 IC18.9 IC21.7 J35.1 J35.2 J35.7 J35.9

## Polygon pours and split planes (outlines as drawn)
GND on Top "Signal Layer 1-No Net 1" (solid, remove dead copper, pour order 0): 0,72.8 21.4,72.8 21.625,72.575 21.625,40.525 21.55,40.45 -0.025,40.45 0,40.475
GND on Bot "Signal Layer 1-No Net 1" (solid, remove dead copper, pour order 2): 15.125,62.675 15.15,62.65 15.15,60.275 6.325,60.275 6.275,60.225 6.15,60.35 6.15,62.725

## Keep-outs
Top:
  lines w0.1: 0,0.9 21.125,0.9 ; 0,71.9 21.45,71.925
Bot:
  lines w0.1: 0,2.65 21.2,2.65 ; 0,70.15 21.375,70.15
KeepOutLayer:
  lines w0.1: 0,72.8 0,68.35 6.575,68.35 6.625,68.4 ; 5.875,59.925 5.875,60.675 ; 5.95,58.5 5.75,58.3 0,58.3 0,0 21.4,0 ; 15.181,66.206 15.181,66.531 ; 15.2,68.35 21.35,68.35 21.4,68.3 21.4,72.8 ; 15.25,58.3 21.4,58.3 ; 15.275,60.525 15.3,60.5 15.3,60.05 ; 15.625,14.475 21.375,14.475 21.4,14.5 21.4,58.3 ; 21.325,4.425 21.4,4.5 21.4,0 ; 21.4,0 21.4,0 ; 21.4,58.3 21.4,58.3

## Silkscreen, mask and mechanical layers (free items; w line width, h text height)
TopOverlay:
  text "v1.0" at 3.075,41.375 h1.52 r90
  text "PoE PD" at 3.4,28.05 h2 r90
Mechanical1:
  lines w0.1: 21.4,14.5 21.4,14.5
  lines w0.254: 0,0 0,43.8 0,58.3 1.5,58.3 1.5,63.6 1.9,64 4.6,64 4.6,64.6 1.9,64.6 1.5,65 1.5,68.3 0,68.3 0,72.8 21.4,72.8 21.4,68.3 19.9,68.3 19.9,64.825 19.7,64.625 16.8,64.625 16.8,64.025 19.575,64.025 19.8,63.8 19.9,63.7 19.9,58.3 21.4,58.3 21.4,14.5 19.9,14.5 19.9,11.2 19.5,10.8 16.8,10.8 16.8,10.2 19.6,10.2 19.9,9.9 19.9,4.5 21.4,4.5 21.4,0 0,0

## Text inside footprints (layer, text, board x,y; h text height)
IC18: TopOverlay "1" at 13.05,4.28 h1.2 r90; Mechanical14 "1" at 13.05,4.28 h1.2 r90
J31: TopOverlay "1" at 14.175,66.705 h1.2; TopOverlay "5" at 13.875,58.725 h1.2; BottomOverlay "6" at 14.05,67.905 h1.2 r180; BottomOverlay "10" at 13,59.925 h1.2 r180
J33: TopOverlay "5" at 6.825,58.52 h1.2; TopOverlay "1" at 7.125,66.5 h1.2; BottomOverlay "10" at 6.95,59.72 h1.2 r180; BottomOverlay "6" at 7.25,67.7 h1.2 r180
J35: TopOverlay "1" at 14.175,12.88 h1.2; TopOverlay "5" at 13.875,4.9 h1.2; BottomOverlay "6" at 14.05,14.08 h1.2 r180; BottomOverlay "10" at 13,6.1 h1.2 r180